# Altium PCB fullflex-1.PcbDoc (part 2 of 2)
Units mil, origin at the board's own origin, x right, y up, seen from the top; angles counter-clockwise.
Board outline 1000.01 x 1200 mil, 4 copper layers (NiCuAu, RF Layer, RF Ground, Signal Layer), stack 13.386 mil thick; 55 components, 23 nets, 173 pads, 89 vias.
Unrouted connection lines stored in the file: 143.
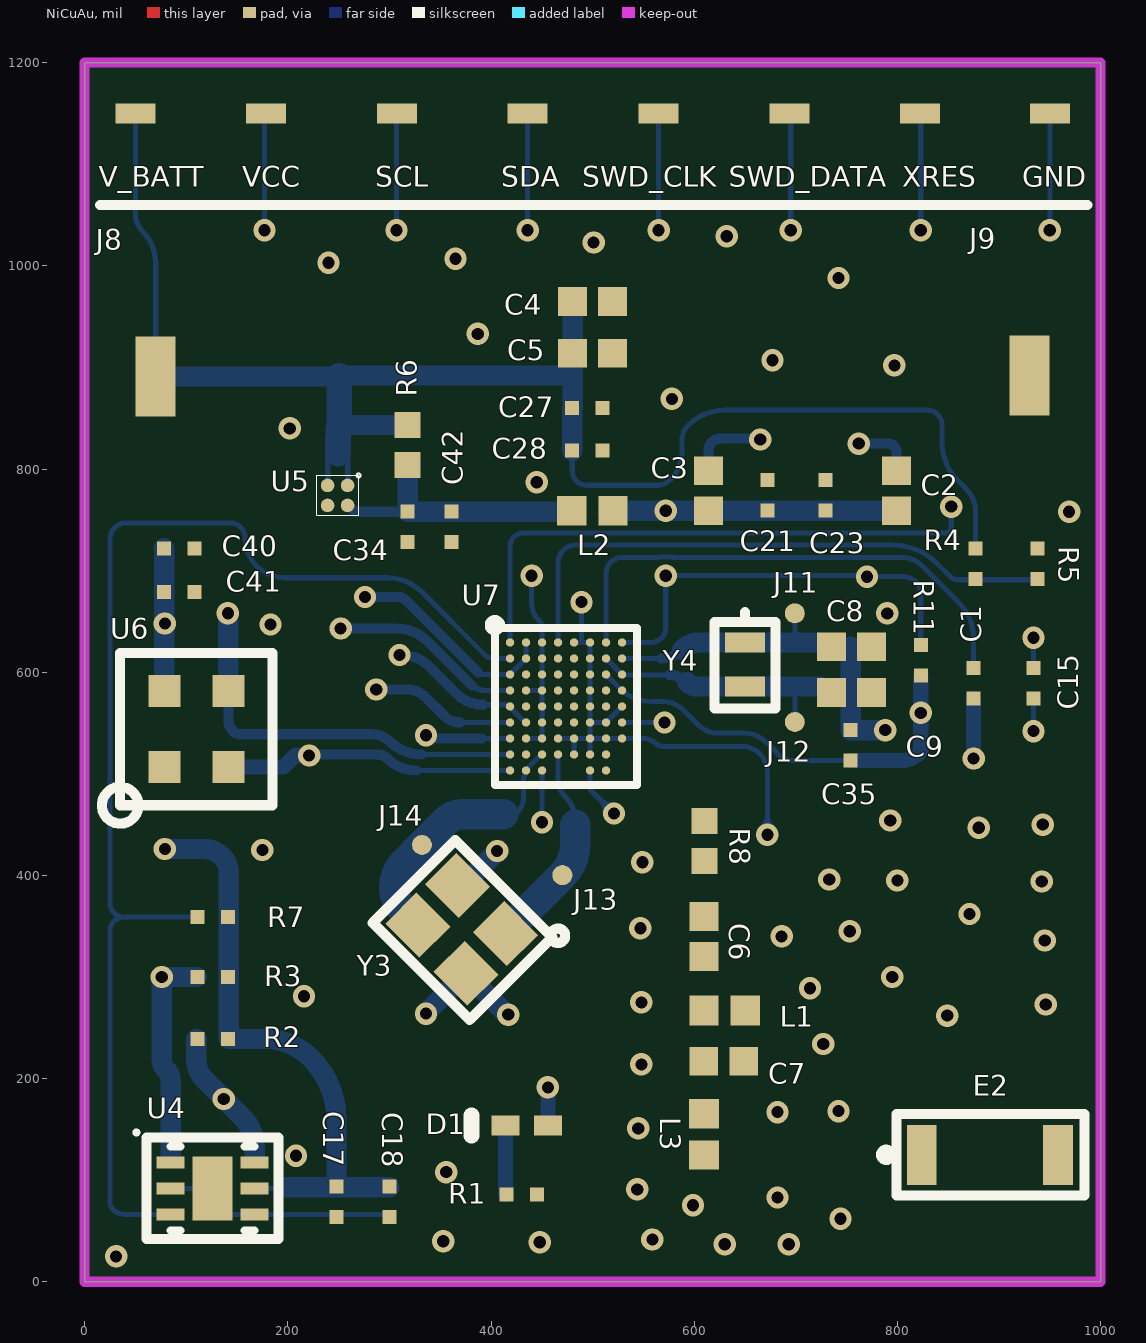
[diagram p0: NiCuAu view]

## Via types
v1: diameter 22, hole 12, NiCuAu to Signal Layer, 89 vias

## Nets (pads, with @x,y where several pads share a name; then routed paths per layer and width w, separated by ;. In a path a pad name is that pad's centre, name@x,y a point inside that pad or via, vN(x,y) a via of type N, cw(c..) or ccw(c..) an arc to the next point about the centre after c; other vN are vias at no path point) (continued)
XTAL_HF_P: (continued)
  Signal Layer w5: 414.33,342.67 cw(c418.31,342.67) 415.49,345.49 ; 466,519.01 466,493.49 ccw(c486.49,493.49) 472,479 cw(c445.44,452.44) 483,452.44 483,450
  Signal Layer w30: 415.49,345.49 470.27,400.27 ccw(c439.54,431) 483,431 483,450
XTAL_LF_N: C9.1 J12.1 U7.B7 Y4.2 | length 255.6
  Signal Layer w5: 513.24,613.49 529.49,597.25 575.49,597.25 ; 699,551 699,585.85 699,586
  Signal Layer w10: 575.49,597.25 cw(c575.49,572.49) 593,590
  Signal Layer w20: 593,590 ccw(c603.01,600.01) 603.01,585.85 699,585.85 ; 699,586 724.04,586
XTAL_LF_P: C8.1 J11.1 U7.B8 Y4.1 | length 228.2
  Signal Layer w5: 528.99,613.5 567.47,613.5 ; 699,629.25 699,658 ; 722.23,629.25 ccw(c722.23,631.81) 724.04,630
  Signal Layer w10: 567.47,613.5 ccw(c567.47,642.53) 588,622
  Signal Layer w20: 588,622 cw(c605.51,604.49) 605.51,629.25 699,629.25 722.23,629.25
pads on no net: E2.2 U7.A3 U7.B3 U7.B4 U7.B5 U7.B6 U7.C2 U7.C3 U7.C4 U7.C5 U7.C6 U7.C8 U7.D3 U7.D4 U7.D5 U7.D7 U7.D8 U7.E1 U7.E2 U7.E3 U7.E4 U7.E5 U7.E6 U7.E7 U7.F3 U7.F4 U7.F5 U7.G3 U7.H2 U7.J2 U7.J7

## Polygon pours and split planes (outlines as drawn)
GND on RF Ground "GND_BOTTOM" (hatched 45Degree grid 15 track 5, remove dead copper, pour order 1008): 0,0 0,1200 1000,1200 1000,500 500,500 500,0
GND on RF Ground "RF_GND_BOTTOM" (solid, remove dead copper, pour order 1016): 500,0 500,500 1000,500 1000,0
GND on Signal Layer "GND_TOP" (hatched 45Degree grid 15 track 5, remove dead copper, pour order 1004): 0,0 0,1200 1000,1200 1000,500 500,500 500,0
GND on RF Layer "RF_GND_TOP" (solid, remove dead copper, pour order 1012): 500,0 500,500 1000,500 1000,0

## Keep-outs
Keep-Out Layer:
  the board outline again, w10

## Other copper
RF Layer:
  pour cut-out: 1000,0 775,0 775,225 1000,225
Signal Layer:
  pour cut-out: 1000,0 775,0 775,225 1000,225
  pour cut-out: 515,500 250,500 250,250 515,250
  pour cut-out: 572,695 740,695 740,540 570.8,540 570.8,550.5

## Silkscreen, mask and mechanical layers (free items; w line width, h text height)
Top Overlay:
  lines w10: 15,1060 987,1060
Mechanical 1:
  lines w3.94: 0,1000 0,-0.06 1000,-0.06 1000,1000
  lines w4: 0,1000 1000,1000